# EAGLE board multiple (EAGLE 9.0.1)
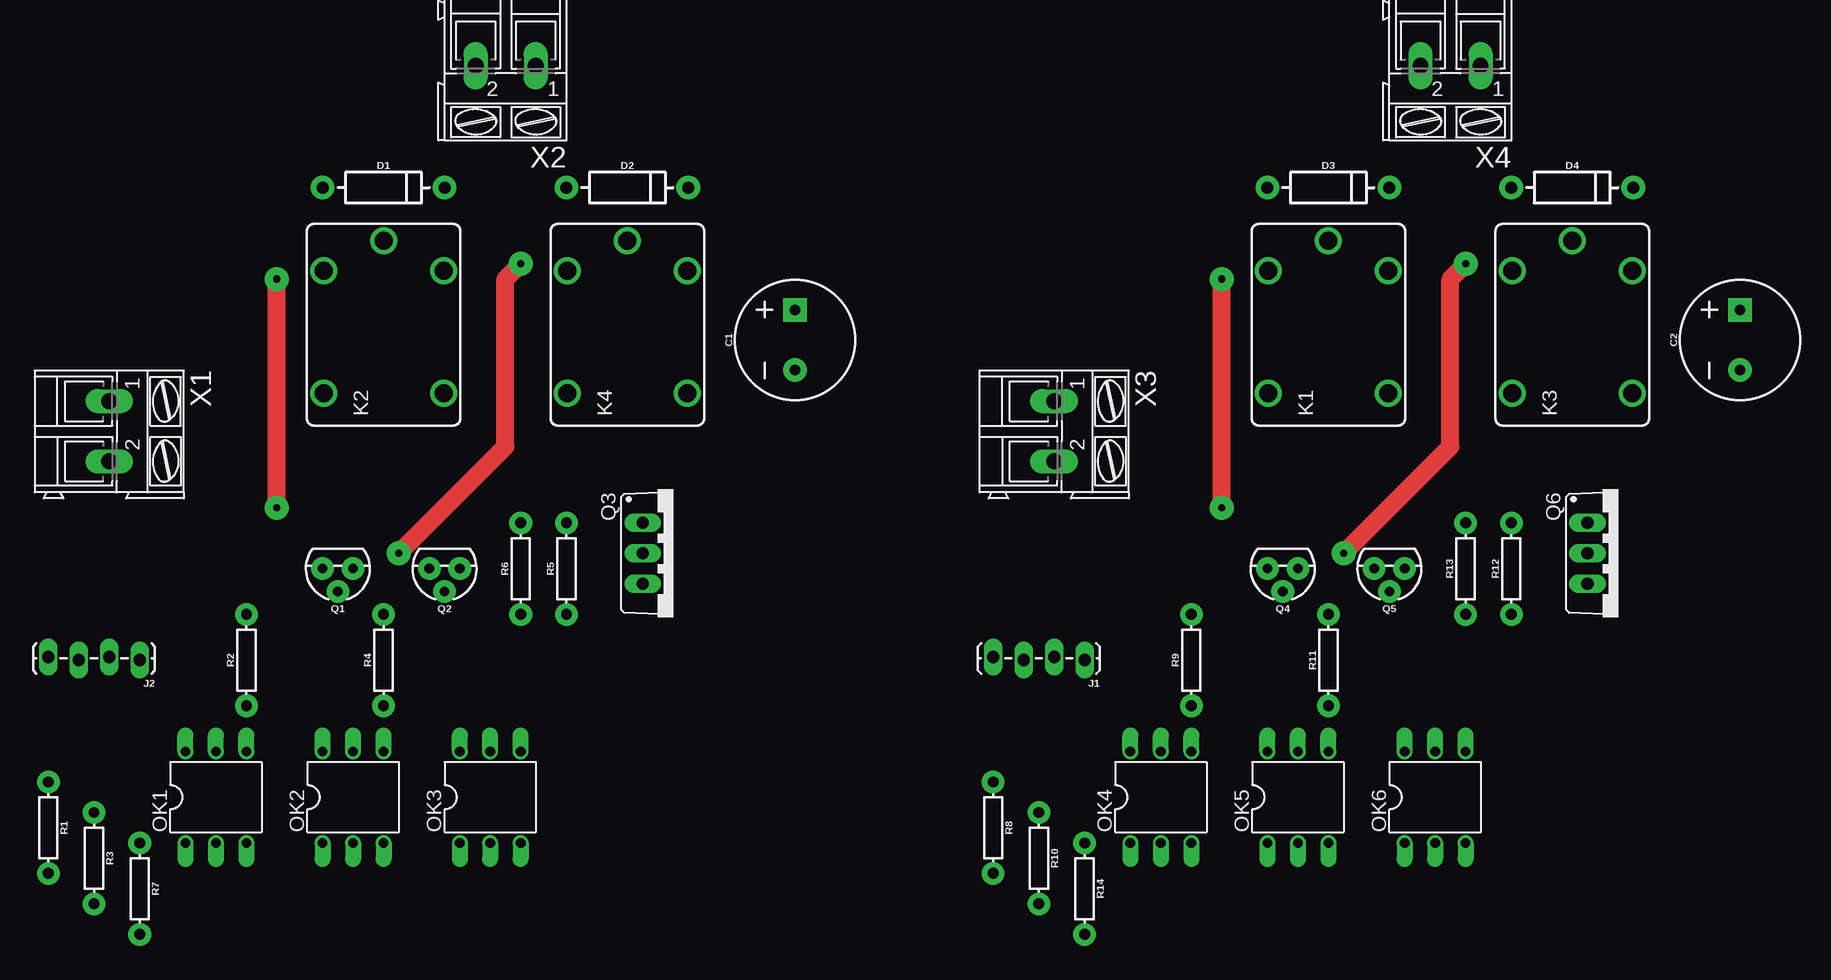
[diagram p0: board, top side]
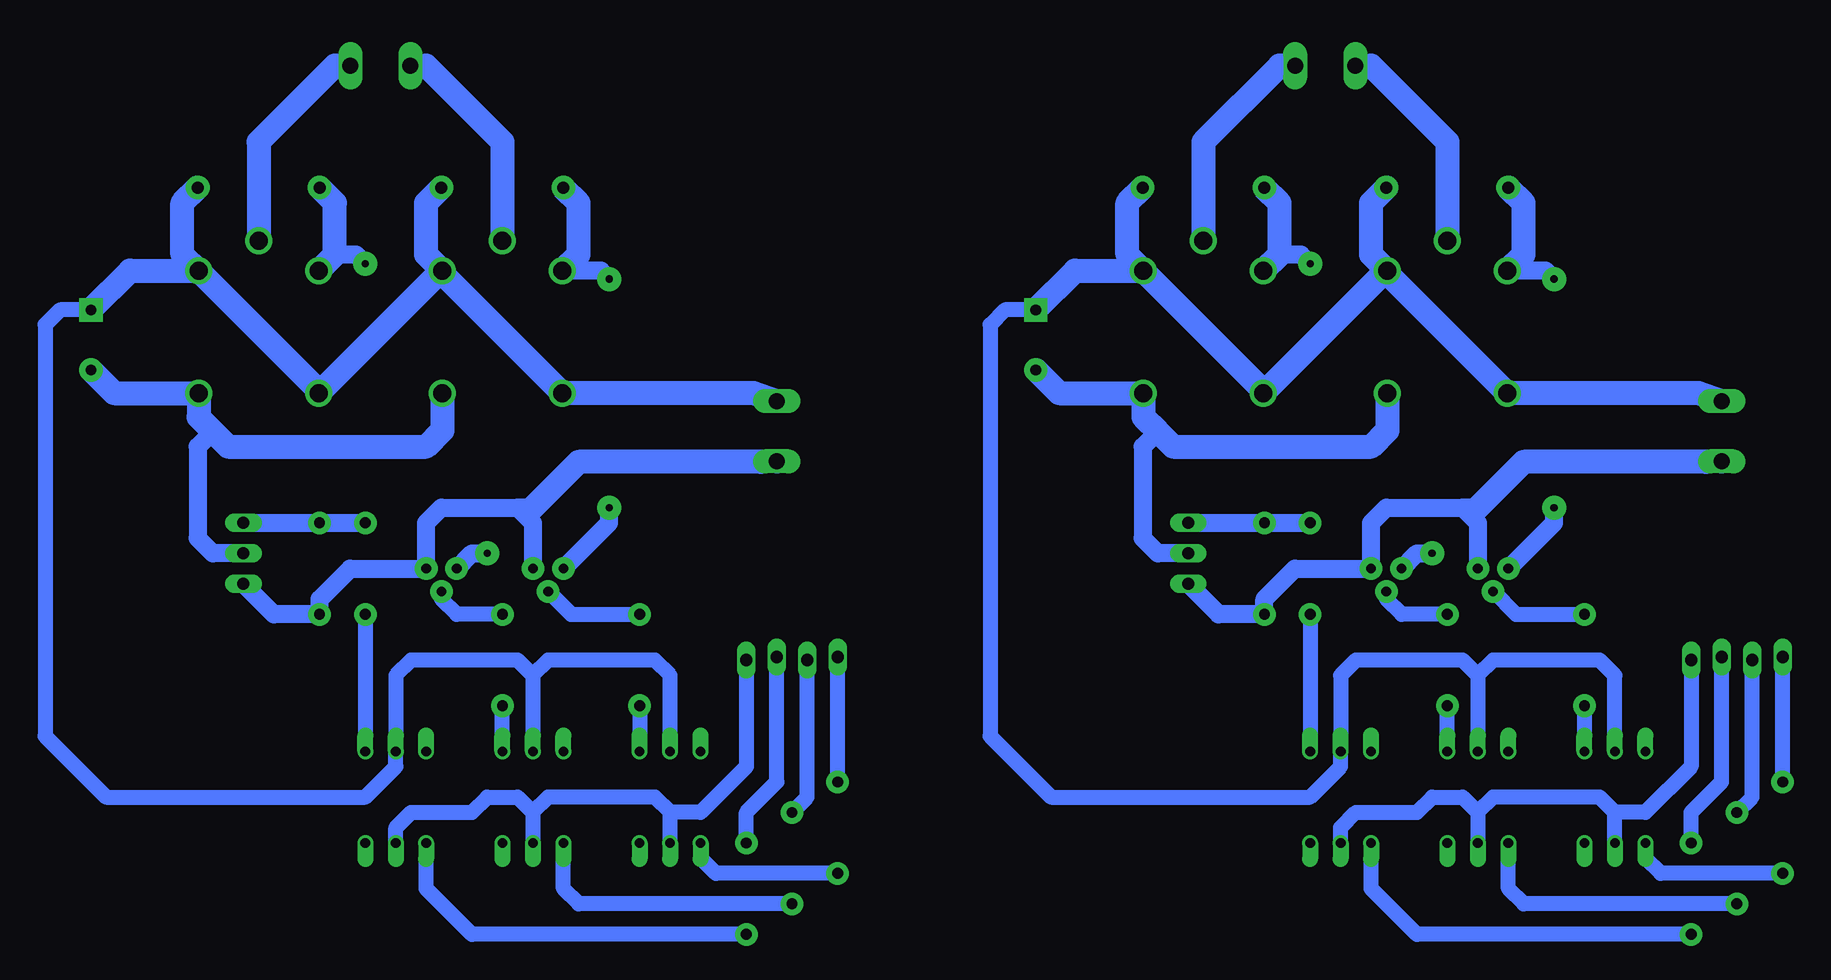
[diagram p1: board, bottom side, seen from below]

No outline drawn. Coordinates in mm, seen from the top.
Copper layers (1*16): Top 0.035mm / dielectric 1.5mm / Bottom 0.035mm
Design rules "default": minimum track width 6mil, minimum drill 0.35mm, track to track 6mil, track to pad 6mil, pad to pad 6mil, via to via 6mil, smd to smd 6mil, copper to edge 40mil, drill to drill 6mil, minimum pad ring 10mil, minimum via ring 8mil, stop-mask expansion 4mil, vias tented up to drill 0mil, thermal gap 10mil

## Footprints (pad centres in the part's own frame; a part is rotated, then mirrored left to right if it is on the bottom)
CPOL-RADIAL-5MM-10MM = drill 0.9 pad 1.93 square: + 2.5,0 | drill 0.9 pad 1.93: - -2.5,0
DIODE-1N4001 = drill 1 pad 1.981: A -5.08,0; C 5.08,0
1X04_LOCK_LONGPADS = drill 1.016 long: 1 0,0; 2 2.54,-0.254; 3 5.08,0; 4 7.62,-0.254
CQ1 = drill 1.5: 1 4.5,-5; 2 4.5,5; C 7,0; NC -5.7,-5; NO -5.7,5
DIL06 = drill 0.813 offset: 1 -2.54,-3.81; 2 0,-3.81; 3 2.54,-3.81; 4 2.54,3.81; 5 0,3.81; 6 -2.54,3.81
TO-92 = drill 0.813 pad 1.88: 1 -1.27,0; 2 0,1.905; 3 1.27,0
TO220BV = drill 1.016 long: D 0,-2.54; G -2.54,-2.54; S 2.54,-2.54
AXIAL-0.3 = drill 0.9 pad 1.88: P$1 -3.81,0; P$2 3.81,0
AK300/2 = drill 1.321 long: 1 -2.515,0; 2 2.489,0

## Placement (x,y rotation side)
C1  1mF  [CPOL-RADIAL-5MM-10MM]  73.66,59.69 90 top
C2  1mF  [CPOL-RADIAL-5MM-10MM]  152.4,59.69 90 top
D1  1N4007  [DIODE-1N4001]  39.37,72.39 0 top
D2  1N4007  [DIODE-1N4001]  59.69,72.39 0 top
D3  1N4007  [DIODE-1N4001]  118.11,72.39 0 top
D4  1N4007  [DIODE-1N4001]  138.43,72.39 0 top
J1  [1X04_LOCK_LONGPADS]  97.79,33.02 180 top
J2  [1X04_LOCK_LONGPADS]  19.05,33.02 180 top
K1  CQ1-12V  [CQ1]  118.11,60.96 90 top
K2  CQ1-12V  [CQ1]  39.37,60.96 90 top
K3  CQ1-12V  [CQ1]  138.43,60.96 90 top
K4  CQ1-12V  [CQ1]  59.69,60.96 90 top
OK1  4N25M  [DIL06]  25.4,21.59 0 top
OK2  4N25M  [DIL06]  36.83,21.59 0 top
OK3  4N25M  [DIL06]  48.26,21.59 0 top
OK4  4N25M  [DIL06]  104.14,21.59 0 top
OK5  4N25M  [DIL06]  115.57,21.59 0 top
OK6  4N25M  [DIL06]  127,21.59 0 top
Q1  2N3904  [TO-92]  35.56,40.64 180 top
Q2  2N3904  [TO-92]  44.45,40.64 180 top
Q3  IRF540  [TO220BV]  63.5,41.91 270 top
Q4  2N3904  [TO-92]  114.3,40.64 180 top
Q5  2N3904  [TO-92]  123.19,40.64 180 top
Q6  IRF540  [TO220BV]  142.24,41.91 270 top
R1  150  [AXIAL-0.3]  11.43,19.05 270 top
R2  1k  [AXIAL-0.3]  27.94,33.02 90 top
R3  150  [AXIAL-0.3]  15.24,16.51 270 top
R4  1k  [AXIAL-0.3]  39.37,33.02 90 top
R5  40k  [AXIAL-0.3]  54.61,40.64 90 top
R6  100  [AXIAL-0.3]  50.8,40.64 90 top
R7  150  [AXIAL-0.3]  19.05,13.97 270 top
R8  150  [AXIAL-0.3]  90.17,19.05 270 top
R9  1k  [AXIAL-0.3]  106.68,33.02 90 top
R10  150  [AXIAL-0.3]  93.98,16.51 270 top
R11  1k  [AXIAL-0.3]  118.11,33.02 90 top
R12  40k  [AXIAL-0.3]  133.35,40.64 90 top
R13  100  [AXIAL-0.3]  129.54,40.64 90 top
R14  150  [AXIAL-0.3]  97.79,13.97 270 top
X1  [AK300/2]  16.51,52.07 270 top
X2  [AK300/2]  49.53,82.55 180 top
X3  [AK300/2]  95.25,52.07 270 top
X4  [AK300/2]  128.27,82.55 180 top

## Library data of the parts
C1 C2 = SparkFun-Capacitors; PROD_ID: CAP-09538
D1-D4 = SparkFun-DiscreteSemi; PROD_ID: DIO-09176
J1 J2 = SparkFun-Connectors; PROD_ID: CONN-09696
K1-K4 = relay; OC_FARNELL: unknown; OC_NEWARK: unknown
OK1-OK6 = optocoupler; MPN: 4N25-M; OC_FARNELL: 1021349; OC_NEWARK: 98K9084
Q1 Q2 Q4 Q5 = SparkFun-DiscreteSemi; PROD_ID: TRANS-08447
Q3 Q6 = transistor-power
R1-R14 = SparkFun-Resistors; PROD_ID: RES-12183
X1-X4 = con-ptr500; OC_FARNELL: unknown; OC_NEWARK: unknown

## Nets
+12V: C1.+ D1.C D2.C K2.1 K2.NO K4.1 K4.NO OK1.5 OK2.5 OK3.5 X1.1
+12V1: C2.+ D3.C D4.C K1.1 K1.NO K3.1 K3.NO OK4.5 OK5.5 OK6.5 X3.1
GND: J2.1 OK1.2 OK2.2 OK3.2
GND1: Q1.1 Q2.1 Q3.S R5.P$1 X1.2
GND2: Q4.1 Q5.1 Q6.S R12.P$1 X3.2
GND3: J1.1 OK4.2 OK5.2 OK6.2
N$1: Q1.2 R2.P$2
N$2: K4.C X2.1
N$3: OK1.1 R1.P$2
N$4: K2.C X2.2
N$5: D1.A K2.2 Q1.3
N$6: OK2.1 R3.P$2
N$7: OK1.4 R2.P$1
N$8: D2.A K4.2 Q2.3
N$9: OK2.4 R4.P$1
N$10: Q2.2 R4.P$2
N$11: C1.- K2.NC K4.NC Q3.D
N$12: OK3.4 R6.P$1
N$13: Q3.G R5.P$2 R6.P$2
N$14: OK4.1 R8.P$2
N$15: OK3.1 R7.P$2
N$16: D3.A K1.2 Q4.3
N$17: OK4.4 R9.P$1
N$18: Q4.2 R9.P$2
N$19: OK5.1 R10.P$2
N$20: D4.A K3.2 Q5.3
N$21: OK5.4 R11.P$1
N$22: Q5.2 R11.P$2
N$23: C2.- K1.NC K3.NC Q6.D
N$24: OK6.4 R13.P$1
N$25: Q6.G R12.P$2 R13.P$2
N$26: OK6.1 R14.P$2
N$27: K3.C X4.1
N$28: K1.C X4.2
P1A: J2.4 R1.P$1
P1A1: J1.4 R8.P$1
P1B: J2.3 R3.P$1
P1B1: J1.3 R10.P$1
P1PWM: J2.2 R7.P$1
P1PWM1: J1.2 R14.P$1

## Tracks (layer width: path | path; a pad name or v marks a point on that pad's centre or on a via)
+12V
  Bottom 1.27: OK1.5 25.4,31.75 26.67,33.02 35.56,33.02 36.83,31.75 | 36.83,31.75 OK2.5 | 36.83,31.75 38.1,33.02 46.99,33.02 48.26,31.75 OK3.5 48.26,24.13 50.8,21.59 72.39,21.59 77.47,26.67 77.47,60.96 76.24,62.19 C1.+
  Bottom 2: K2.1 45.72,66.81 45.72,71.12 D1.C | K4.1 66.04,66.81 66.04,71.12 D2.C | K4.1 54.69,55.46 K4.NO 44.49,65.46 K2.1 | K2.1 44.37,65.26 K2.NO 18.45,55.26 X1.1 | C1.+ 70.39,65.46 K4.1
+12V1
  Bottom 1.27: OK4.5 104.14,31.75 105.41,33.02 114.3,33.02 115.57,31.75 | 115.57,31.75 OK5.5 | 115.57,31.75 116.84,33.02 125.73,33.02 127,31.75 OK6.5 127,24.13 129.54,21.59 151.13,21.59 156.21,26.67 156.21,60.96 154.98,62.19 C2.+
  Bottom 2: K1.1 124.46,66.81 124.46,71.12 D3.C | K3.1 144.78,66.81 144.78,71.12 D4.C | K3.1 133.43,55.46 K3.NO 123.23,65.46 K1.1 | K1.1 123.11,65.26 K1.NO 97.19,55.26 X3.1 | C2.+ 149.13,65.46 K3.1
GND
  Bottom 1.27: OK1.2 25.4,20.32 | 25.4,20.32 26.67,21.59 35.56,21.59 36.83,20.32 | 36.83,20.32 OK2.2 | 36.83,20.32 38.1,21.59 40.64,21.59 41.91,20.32 46.99,20.32 48.26,19.05 OK3.2 | J2.1 19.05,24.13 22.86,20.32 25.4,20.32
GND1
  Bottom 1.5: Q3.S 58.42,36.83 R5.P$1 54.61,38.1 52.07,40.64 Q2.1 45.72,44.45 44.45,45.72 38.1,45.72 | 38.1,45.72 36.83,44.45 Q1.1 | 36.83,45.72 38.1,45.72
  Bottom 2: X1.2 17.83,49.53 33.02,49.53 36.83,45.72
GND2
  Bottom 1.5: Q6.S 137.16,36.83 R12.P$1 133.35,38.1 130.81,40.64 Q5.1 124.46,44.45 123.19,45.72 116.84,45.72 | 116.84,45.72 115.57,44.45 Q4.1 | 115.57,45.72 116.84,45.72
  Bottom 2: X3.2 96.57,49.53 111.76,49.53 115.57,45.72
GND3
  Bottom 1.27: OK4.2 104.14,20.32 | 104.14,20.32 105.41,21.59 114.3,21.59 115.57,20.32 | 115.57,20.32 OK5.2 | 115.57,20.32 116.84,21.59 119.38,21.59 120.65,20.32 125.73,20.32 127,19.05 OK6.2 | J1.1 97.79,24.13 101.6,20.32 104.14,20.32
N$1
  Bottom 1.27: Q1.2 33.66,36.83 R2.P$2
N$2
  Bottom 2: X2.1 53.34,82.55 59.69,76.2 K4.C
N$3
  Bottom 1.27: OK1.1 22.86,16.51 21.59,15.24 R1.P$2
N$4
  Bottom 2: X2.2 45.72,82.55 39.37,76.2 K2.C
N$5  (via drill 0.6 pad 2)
  Top 1.5: v30.48,45.72 v30.48,64.77
  Bottom 1.5: v30.48,64.77 31.17,65.46 K2.2 | Q1.3 30.48,44.45 v30.48,45.72
  Bottom 2: K2.2 33.02,66.81 33.02,71.12 D1.A
N$6
  Bottom 1.27: R3.P$2 33.02,12.7 34.29,13.97 OK2.1
N$7
  Bottom 1.27: R2.P$1 OK1.4
N$8  (via drill 0.6 pad 2)
  Top 1.5: v40.64,41.91 49.53,50.8 49.53,64.77 v50.8,66.04
  Bottom 1.5: Q2.3 41.91,41.91 v40.64,41.91 | v50.8,66.04 51.57,66.81 53.34,66.81
  Bottom 2: K4.2 53.34,66.81 53.34,71.12 D2.A
N$9
  Bottom 1.27: OK2.4 R4.P$1
N$10
  Bottom 1.27: R4.P$2 43.18,36.83 44.45,38.1 Q2.2
N$11
  Bottom 1.5: Q3.D 63.5,41.91 64.77,43.18 64.77,50.8 63.5,52.07
  Bottom 2: K2.NC 44.37,52.15 45.72,50.8 62.23,50.8 63.5,52.07 64.69,53.26 K4.NC 71.73,55.26 C1.-
N$12
  Bottom 1.27: R6.P$1 OK3.4
N$13
  Bottom 1.5: Q3.G R5.P$2 R6.P$2
N$14
  Bottom 1.27: OK4.1 101.6,16.51 100.33,15.24 R8.P$2
N$15
  Bottom 1.27: OK3.1 45.72,13.97 41.91,10.16 R7.P$2
N$16  (via drill 0.6 pad 2)
  Top 1.5: v109.22,45.72 v109.22,64.77
  Bottom 1.5: v109.22,64.77 109.91,65.46 K1.2 | Q4.3 109.22,44.45 v109.22,45.72
  Bottom 2: K1.2 111.76,66.81 111.76,71.12 D3.A
N$17
  Bottom 1.27: R9.P$1 OK4.4
N$18
  Bottom 1.27: Q4.2 112.39,36.83 R9.P$2
N$19
  Bottom 1.27: R10.P$2 111.76,12.7 113.03,13.97 OK5.1
N$20  (via drill 0.6 pad 2)
  Top 1.5: v119.38,41.91 128.27,50.8 128.27,64.77 v129.54,66.04
  Bottom 1.5: Q5.3 120.65,41.91 v119.38,41.91 | v129.54,66.04 130.31,66.81 132.08,66.81
  Bottom 2: K3.2 132.08,66.81 132.08,71.12 D4.A
N$21
  Bottom 1.27: OK5.4 R11.P$1
N$22
  Bottom 1.27: R11.P$2 121.92,36.83 123.19,38.1 Q5.2
N$23
  Bottom 1.5: Q6.D 142.24,41.91 143.51,43.18 143.51,50.8 142.24,52.07
  Bottom 2: K1.NC 123.11,52.15 124.46,50.8 140.97,50.8 142.24,52.07 143.43,53.26 K3.NC 150.47,55.26 C2.-
N$24
  Bottom 1.27: R13.P$1 OK6.4
N$25
  Bottom 1.5: Q6.G R12.P$2 R13.P$2
N$26
  Bottom 1.27: OK6.1 124.46,13.97 120.65,10.16 R14.P$2
N$27
  Bottom 2: X4.1 132.08,82.55 138.43,76.2 K3.C
N$28
  Bottom 2: X4.2 124.46,82.55 118.11,76.2 K1.C
P1A
  Bottom 1.27: R1.P$1 J2.4
P1A1
  Bottom 1.27: R8.P$1 J1.4
P1B
  Bottom 1.27: R3.P$1 13.97,21.59 J2.3
P1B1
  Bottom 1.27: R10.P$1 92.71,21.59 J1.3
P1PWM
  Bottom 1.27: R7.P$1 19.05,20.32 16.51,22.86 J2.2
P1PWM1
  Bottom 1.27: R14.P$1 97.79,20.32 95.25,22.86 J1.2